# Altium PCB T7BR-PCB.PcbDoc
Units mm, origin at the board's own origin, x right, y up, seen from the top; angles counter-clockwise.
Board outline 149.61 x 68.45 mm, 2 copper layers (Top Layer, Bottom Layer), stack 1.671 mm thick; 35 components, 34 nets, 161 pads, 7 vias.
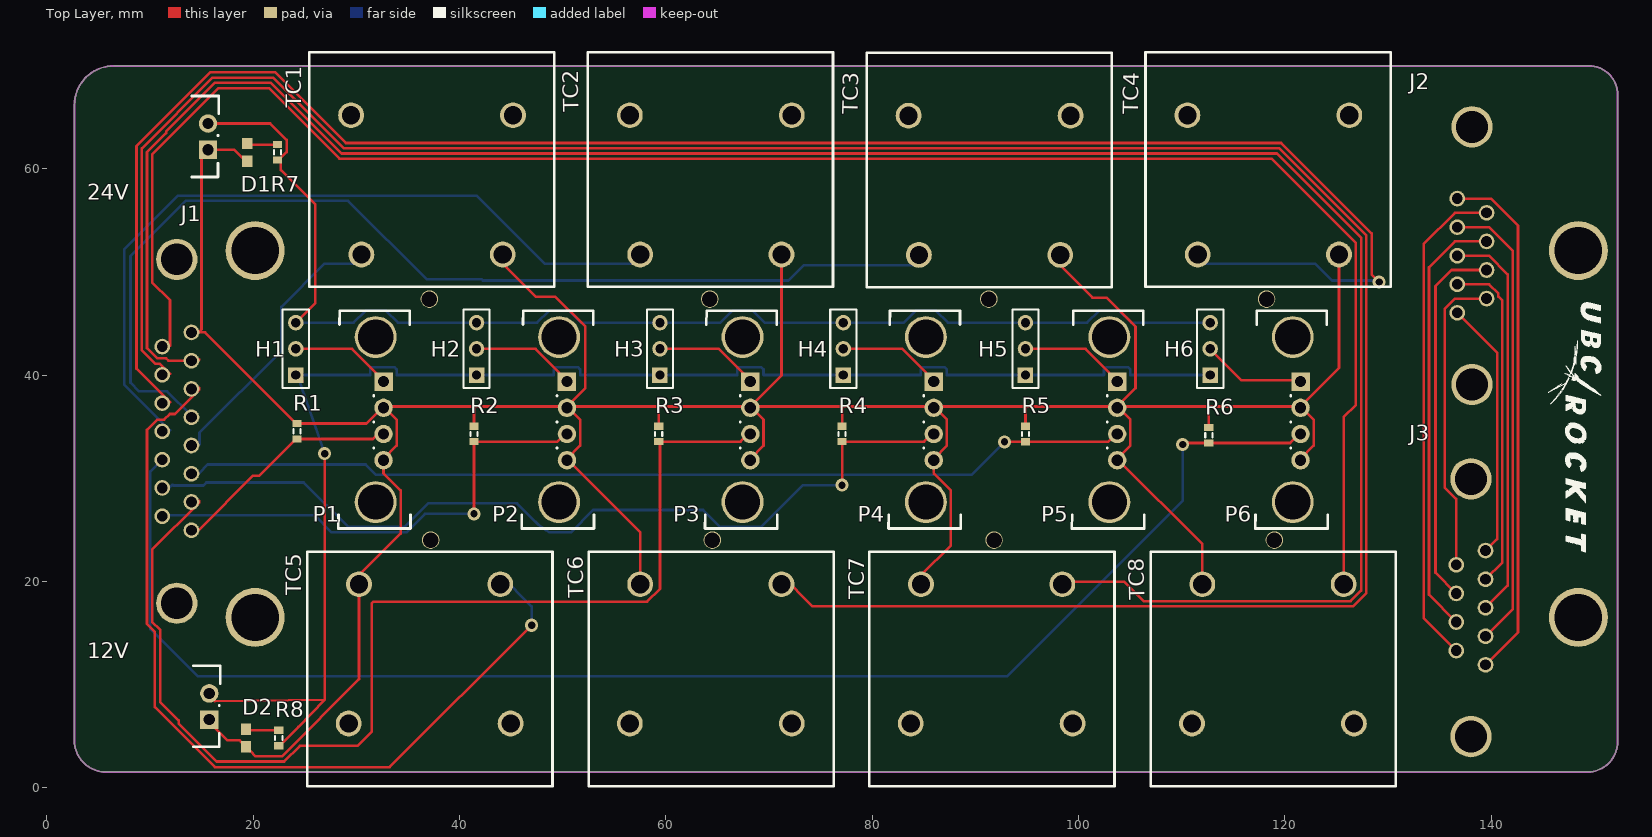
[diagram p0: Top Layer view]
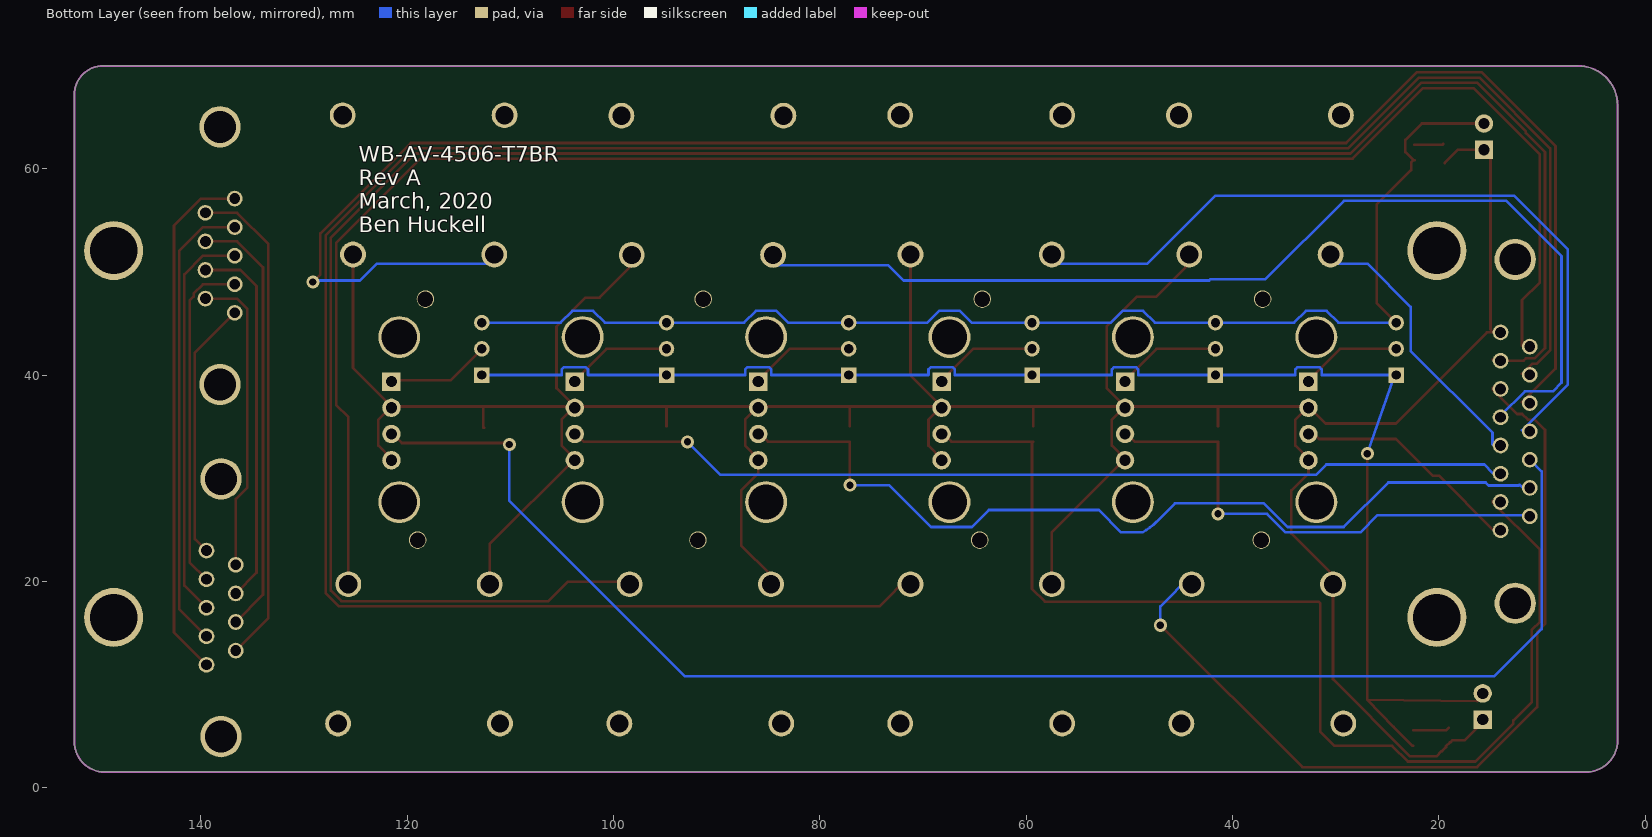
[diagram p1: Bottom Layer view, seen from below]
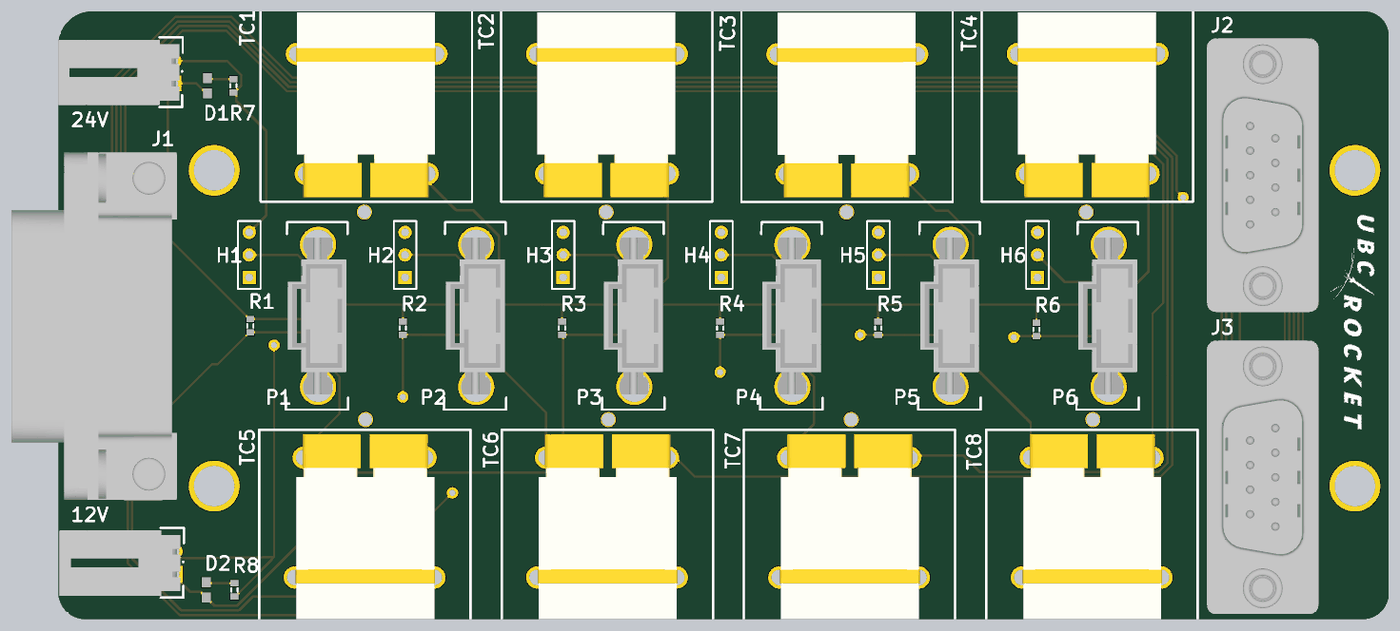
[diagram p2: 3D render of the assembled board from above, using the file's embedded part models]

## Layer stack, top to bottom
Top Solder: solder mask 0.0102, Solder Resist, Dk 3.5
Top Layer: signal copper 0.0356
Dielectric 1: dielectric 1.6, FR-4, Dk 4.8
Bottom Layer: signal copper 0.0356
Bottom Solder: solder mask 0.0102, Solder Resist, Dk 3.5

## Board outline
6.477,69.977 149.479,69.977 cw(c149.479,67.183) 152.273,67.183 152.273,4.445 cw(c149.352,4.445) 149.352,1.524 5.715,1.524 cw(c5.715,4.572) 2.667,4.572 2.667,66.167 cw(c6.477,66.167)

## Design rules (kind name [scope] priority, off if disabled: settings)
Clearance [All] p1: gap=0.152 ignorepadtopadclearanceinfootprint=FALSE except(0: Arc-Hole Track-Hole SMDPad-Hole THPad-Hole Via-Hole Fill-Hole Poly-Hole Region-Hole Text-Hole)
ComponentClearance [All] p1: gap=0 collisioncheckmode=3 verticalgap=0.003 showdistances=FALSE
HoleSize [All] p1: absolutevalues=TRUE maxlimit=25.4 minlimit=0.025 maxpercent=80.000 minpercent=20.000
MinimumSolderMaskSliver [All] p1: minsoldermaskwidth=0.025
PolygonConnect [All] p1: connectstyle=Direct reliefconductorwidth=0.254 reliefentries=4 polygonreliefangle="90 Angle" airgapwidth=0.254
RoomDefinition BMS_REV_A1 [InComponentClass('BMS_REV_A1')] p1: confinementstyle=ConfineIn formatcopy=TRUE lockcomponents=FALSE outline -17.201,7.071 85.199,7.071 85.199,75.57 -17.201,75.57
RoutingVias [All] p1: holewidth=0.2 width=0.505 viastyle="Through Hole" minholewidth=0.2 minwidth=0.505 maxholewidth=0.711 maxwidth=1.27
SilkToSilkClearance [All] p1: silktosilkclearance=0.025
SilkToSolderMaskClearance [IsPad] p1: minsilkscreentomaskgap=0.025 clearancetoexposedcopper=TRUE
SolderMaskExpansion [All] p1: expansion=0.102 istentingtop=FALSE
Width [All] p1: maxlimit=5.08 minlimit=0.254 preferedwidth=0.305
25 further rules are at their usual default settings.

## Components (designator, comment, footprint, x,y, rotation, side; value= is the part's Value field where it differs from the comment)
12V "Header 2H" WM4900-ND 17.272,14.376 r180 top
24V "Header 2H" WM4900-ND 17.145,69.621 r180 top
D1 "" *0603 19.431,61.595 r90 top
D2 "" *0603 19.304,4.826 r90 top
H1 "Header 3" HDR1X3 24.13,40.005 r90 top
H2 "Header 3" HDR1X3 41.656,40.005 r90 top
H3 "Header 3" HDR1X3 59.436,40.005 r90 top
H4 "Header 3" HDR1X3 77.216,40.005 r90 top
H5 "Header 3" HDR1X3 94.869,40.005 r90 top
H6 "Header 3" HDR1X3 112.776,40.005 r90 top
J1 "Connector 15" DSUB_15 12.596,17.879 r90 top
J2 "D Connector 9" DSUB_9 138.153,39.079 r90 top
J3 "D Connector 9" DSUB_9 138.049,29.943 r270 top
P1 "Header 4" WM4900-ND-4 31.115,31.598 r0 top
P2 "Header 4" WM4900-ND-4 48.895,31.598 r0 top
P3 "Header 4" WM4900-ND-4 66.675,31.598 r0 top
P4 "Header 4" WM4900-ND-4 84.455,31.598 r0 top
P5 "Header 4" WM4900-ND-4 102.235,31.598 r0 top
P6 "Header 4" WM4900-ND-4 120.015,31.598 r0 top
R1 "" J1-0603 24.257,34.556 r270 top value=500
R2 "" J1-0603 41.402,34.302 r270 top value=500
R3 "" J1-0603 59.309,34.302 r270 top value=500
R4 "" J1-0603 77.089,34.302 r270 top value=500
R5 "" J1-0603 94.869,34.29 r270 top value=500
R6 "" J1-0603 112.649,34.163 r270 top value=500
R7 "Res3" J1-0603 22.352,61.595 r90 top value=1.1K
R8 "Res3" J1-0603 22.479,4.826 r90 top value=500
TC1 "Header 4H" "Thermocouple F" 29.489,65.189 r0 top
TC2 "Header 4H" "Thermocouple F" 56.515,65.189 r0 top
TC3 "Header 4H" "Thermocouple F" 83.541,65.151 r0 top
TC4 "Header 4H" "Thermocouple F" 110.566,65.189 r0 top
TC5 "Header 4H" "Thermocouple F" 44.958,6.223 r180 top
TC6 "Header 4H" "Thermocouple F" 72.215,6.223 r180 top
TC7 "Header 4H" "Thermocouple F" 99.441,6.223 r180 top
TC8 "Header 4H" "Thermocouple F" 126.714,6.223 r180 top

## Footprints (in the part's own frame and the unit in brackets; to place one, negate y for a bottom-side part, rotate by r counter-clockwise, add the part's x,y. Pads: shape width x height; smd on the part's side, far side on the other; paste and mask are expansions set on the pad)
*0603 [mm]
  rect 1.1x1 smd: 1(-0.85,0) 2(0.85,0)
DSUB_9 [mm]
  round 1.524 hole 1.04: 1(6.955,1.42) 2(8.34,-1.42) 3(9.725,1.42) 4(11.11,-1.42) 5(12.495,1.42) 6(13.88,-1.42) 7(15.265,1.42) 8(16.65,-1.42) 9(18.035,1.42)
  round 4 hole 3.1: 10(0,0) 11(24.99,0)
  body extent -2.95,-6.22 27.85,6.33, height 13
DSUB_15 [mm]
  round 1.524 hole 1.04: 1(7.08,-1.42) 2(8.445,1.42) 3(9.82,-1.42) 4(11.185,1.42) 5(12.56,-1.42) 6(13.925,1.42) 7(15.3,-1.42) 8(16.665,1.42) 9(18.04,-1.42) 10(19.405,1.42) 11(20.78,-1.42) 12(22.145,1.42) 13(23.52,-1.42) 14(24.885,1.42) 15(26.26,-1.42)
  round 4 hole 3.05: 16(0,0) 17(33.33,0)
  body extent -2.95,-3.44 36.22,15.16, height 12.79
HDR1X3 [mm] "Connector; Header; 3 Position"
  rect 1.5x1.5 hole 0.9: 1(0,0)
  round 1.5 hole 0.9: 2(2.54,0) 3(5.08,0)
  silkscreen extent -1.27,-1.27 6.35,1.27
J1-0603 [mm] "Chip Resistor, Body 1.6x0.8mm, IPC High Density"
  rect 0.7x0.9 smd: 1(-0.75,0) 2(0.75,0)
  silkscreen extent -0.2,-0.35 0.2,0.35, body extent -0.85,-0.48 0.85,0.48, height 0.9
"Thermocouple F" [mm]
  round 2.5 hole 1.77: 13(0,0) 14(15.7,0) 15(1,-13.5) 16(14.7,-13.5)
  silkscreen extent -4.06,-16.64 19.7,6.1, body extent -0.08,-16.11 15.62,4.68, height 7.35
WM4900-ND [mm]
  rect 1.79x1.79 hole 1.09: 1(1.524,7.772)
  round 1.79 hole 1.09: 2(1.524,5.232)
  silkscreen extent 0.48,2.57 3.1,10.42, body extent 0.89,2.84 14.48,10.21, height 7.11
WM4900-ND-4 [mil]
  rect 70.47x70.47 hole 42.91: 1(60,306)
  round 70.47 hole 42.91: 2(60,206) 3(60,106) 4(60,6)
  round 160 hole 134: 5(30,-154) 6(30,476)
  silkscreen extent -113,-255 163,576, body extent -104,-187 156,509, height 450

## Part data
12V 24V: "Header, 2-Pin, Right Angle", LatestRevisionDate=17-Jul-2002, LatestRevisionNote="Re-released for DXP Platform.", Publisher="Altium Limited"
D1 D2: library part LTST-C191KGKT, "Green 571nm LED Indication - Discrete 2V 0603 _1608 Metric_", Package="0603 Lite-On", Digi-Key_Part_Number=160-1446-1-ND, Digi-Key_Purchase_URL=https://www.digikey.com/product-detail/en/lite-on-inc/LTST-C191KGKT/160-1446-1-ND/386834?utm_source=snapeda&utm_medium=aggregator&utm_campaign=symbol, MF="Lite-On Inc.", MP=LTST-C191KGKT, SnapEDA_Link=https://www.snapeda.com/parts/LTST-C191KGKT/Lite-On%20Inc./view-part/48565/?ref=snap
H1 H2 H3 H4 H5 H6: "Header, 3-Pin", LatestRevisionDate=17-Jul-2002, LatestRevisionNote="Re-released for DXP Platform.", Publisher="Altium Limited"
J1: "Receptacle Assembly, 15-Pin, Sim Line Connector", PackageDocument=B, DatasheetDocument=24-Nov-1999, Gender="Receptacle Header", LatestRevisionDate=17-Jul-2002, LatestRevisionNote="Re-released for DXP Platform.", Orientation="Right Angle", PackageReference=788574, Positions=15, Published=15-Jun-2001, Publisher="Altium Limited"
J2 J3: "Receptacle Assembly, 9 Position, Right Angle", PackageDocument=O, DatasheetDocument=1-Sep-1999, Gender=Receptacle, LatestRevisionDate=17-Jul-2002, LatestRevisionNote="Re-released for DXP Platform.", Orientation="Right Angle", PackageReference=788750, Positions=9, Published=15-Jun-2001, Publisher="Altium Limited"
P1 P2 P3 P4 P5 P6: "Header, 4-Pin", LatestRevisionDate=17-Jul-2002, LatestRevisionNote="Re-released for DXP Platform.", Publisher="Altium Limited"
R1 R2 R3 R4 R5 R6: library part Res3, "Resistor", LatestRevisionDate=29-May-2009, LatestRevisionNote="IPC-7351 Footprint Added.", PackageDescription="Chip Resistor", PackageReference=J1-0603, Published=8-Jun-2000, Publisher="Altium Limited"
R7 R8: "Resistor", LatestRevisionDate=29-May-2009, LatestRevisionNote="IPC-7351 Footprint Added.", PackageDescription="Chip Resistor", PackageReference=J1-0603, Published=8-Jun-2000, Publisher="Altium Limited"
TC1 TC2 TC3 TC4 TC5 TC6 TC7 TC8: "Header, 4-Pin, Right Angle", LatestRevisionDate=17-Jul-2002, LatestRevisionNote="Re-released for DXP Platform.", Publisher="Altium Limited"

## Free pads (board coordinates)
  round 5.715 hole 4.572: 17(20.193,52.07) 18(20.193,16.51) 19(148.463,52.07) 20(148.463,16.51)
  round 1.7 hole 1.5: 21(37.084,47.371) 21(37.211,24.003) 21(64.262,47.371) 21(64.516,24.003) 21(91.313,47.371) 21(91.821,24.003) 21(118.237,47.371) 21(118.999,24.003)

## Via types
v1: diameter 1.27, hole 0.711, Top Layer to Bottom Layer, 7 vias

## Nets (pads, with @x,y where several pads share a name; then routed paths per layer and width w, separated by ;. In a path a pad name is that pad's centre, name@x,y a point inside that pad or via, vN(x,y) a via of type N, cw(c..) or ccw(c..) an arc to the next point about the centre after c; other vN are vias at no path point)
GND: 12V.1 24V.1 D1.1 D2.1 J1.15 P1.2 P1.4 P2.2 P2.4 P3.2 P3.4 P4.2 P4.4 P5.2 P5.4 P6.2 P6.4 R1.1 R2.1 R3.1 R4.1 R5.1 R6.1 TC1.16 TC2.16 TC3.16 TC4.16 TC5.16 TC6.16 TC7.16 TC8.16 | length 333.5
  Top Layer w0.254: J1.15 14.778,44.139 15.324,44.139 24.157,35.306 R1.1 30.988,35.306 P1.2@32.639,36.957 ; 14.778,44.231 14.986,44.439 14.986,61.849 24V.1 18.162,61.849 19.431,60.58 D1.1@19.431,60.53 ; 12V.1@16.256,5.842 17.485,4.613 18.667,4.613 18.881,4.399 18.931,4.399 19.304,4.026 D2.1 19.304,3.926 19.677,3.553 19.727,3.553 20.232,3.048 22.79,3.048 30.258,10.516 30.258,19.977 30.258,20.612 34.29,24.644 34.29,28.812 32.639,30.463 32.639,31.877 33.915,33.153 33.915,35.681 P1.2@32.639,36.957 ; R2.1 41.402,36.957 P1.2@32.639,36.957 ; 41.529,36.957 P2.2@50.419,36.957 ; TC1.16@44.189,50.8 47.397,47.592 49.292,47.592 52.197,44.687 52.197,38.735 P2.2@50.419,36.957 ; TC6.16@57.515,20.612 57.515,24.781 50.419,31.877 51.695,33.153 51.695,35.681 P2.2@50.419,36.957 ; R3.1 59.309,36.957 ; P3.4@68.199,31.877 69.475,33.153 69.475,35.681 P3.2@68.199,36.957 ; TC2.16@71.215,50.8 71.215,39.973 P3.2@68.199,36.957 ; R4.1 77.089,36.957 ; TC7.16@84.741,20.612 87.63,23.501 87.63,28.812 85.979,30.463 85.979,31.877 87.255,33.153 87.255,35.681 P4.2@85.979,36.957 ; R5.1 94.869,36.957 ; TC3.16@98.241,50.635 101.366,47.51 102.715,47.51 105.537,44.687 105.537,38.735 P5.2@103.759,36.957 ; TC8.16@112.014,19.977 112.014,23.622 103.759,31.877 105.035,33.153 105.035,35.681 P5.2@103.759,36.957 ; R6.1 112.549,34.913 112.649,35.013 112.649,36.957 ; P6.4@121.539,31.877 122.815,33.153 122.815,35.681 P6.2@121.539,36.957 ; TC4.16@125.266,50.8 125.266,40.684 P6.2@121.539,36.957 ; P2.2@50.419,36.957 59.309,36.957 ; 59.309,36.957 P3.2@68.199,36.957 ; P3.2@68.199,36.957 77.089,36.957 ; 77.089,36.957 P4.2@85.979,36.957 ; P4.2@85.979,36.957 94.869,36.957 ; 94.869,36.957 P5.2@103.759,36.957 ; P5.2@103.759,36.957 112.649,36.957 ; 112.649,36.957 P6.2@121.539,36.957
Net12V_2: 12V.2 H1.1 H2.1 H3.1 H4.1 H5.1 H6.1 R8.1 | length 144.9
  Top Layer w0.254: 16.256,8.382 26.924,8.509 ; R8.1 22.579,4.076 24.384,5.881 26.924,8.509 ; H1.1@24.111,39.986 H1.1 H1.1@24.753,39.382 ; v1(26.924,32.385) 26.924,8.509
  Bottom Layer w0.254: v1(26.924,32.385) 24.384,39.751 H1.1 31.363,40.005 31.363,40.55 31.586,40.773 33.692,40.773 33.915,40.55 33.915,40.005 H2.1 49.143,40.005 49.143,40.55 49.366,40.773 51.472,40.773 51.695,40.55 51.695,40.005 H3.1 66.923,40.005 66.923,40.55 67.146,40.773 69.252,40.773 69.475,40.55 69.475,40.005 H4.1 84.703,40.005 84.703,40.55 84.926,40.773 87.032,40.773 87.255,40.55 87.255,40.005 H5.1 102.483,40.005 102.483,40.55 102.706,40.773 104.812,40.773 105.035,40.55 105.035,40.005 H6.1
Net24V_2: 24V.2 H1.3 H2.3 H3.3 H4.3 H5.3 H6.3 R7.1 | length 121.2
  Top Layer w0.254: 24V.2@16.51,64.389 21.647,64.389 23.241,62.795 23.241,61.634 R7.1@22.452,60.845 ; R7.1 R7.1@22.452,60.845 ; H1.3 26.035,46.99 26.035,56.515 22.675,59.875 22.675,60.622 R7.1@22.452,60.845
  Bottom Layer w0.254: H1.3 29.735,45.085 30.878,46.228 32.876,46.228 34.019,45.085 H2.3 47.515,45.085 48.658,46.228 50.656,46.228 51.799,45.085 H3.3 65.295,45.085 66.438,46.228 68.436,46.228 69.579,45.085 H4.3 83.075,45.085 84.218,46.228 86.216,46.228 87.359,45.085 H5.3 100.855,45.085 101.998,46.228 103.996,46.228 105.139,45.085 H6.3
NetD1_2: D1.2 R7.2 | length 2.8
  Top Layer w0.254: D1.2@19.558,62.406 19.619,62.345 R7.2
NetD2_2: D2.2 R8.2 | length 3.5
  Top Layer w0.254: D2.2@19.05,5.803 19.277,5.576 R8.2
NetH1_2: H1.2 P1.1 | length 9.8
  Top Layer w0.254: H1.2 29.591,42.545 P1.1@32.639,39.497
NetH2_2: H2.2 P2.1 | length 10
  Top Layer w0.254: H2.2 47.371,42.545 P2.1@50.419,39.497
NetH3_2: H3.2 P3.1 | length 10
  Top Layer w0.254: H3.2 65.151,42.545 P3.1@68.199,39.497
NetH4_2: H4.2 P4.1 | length 10
  Top Layer w0.254: H4.2 82.931,42.545 P4.1@85.979,39.497
NetH5_2: H5.2 P5.1 | length 10.2
  Top Layer w0.254: H5.2 100.711,42.545 P5.1@103.759,39.497
NetH6_2: H6.2 P6.1 | length 10
  Top Layer w0.254: H6.2 115.824,39.497 P6.1@121.539,39.497
NetJ1_1: J1.1 P1.3 R1.2 | length 21.7
  Top Layer w0.254: 14.778,25.051 19.953,30.226 20.577,30.226 24.157,33.806 R1.2 31.612,33.806 32.223,34.417 P1.3@32.639,34.417
NetJ1_2: J1.2 P2.3 R2.2 | length 47.3
  Top Layer w0.254: v1(41.402,26.543) R2.2 49.479,33.552 50.344,34.417 P2.3@50.419,34.417
  Bottom Layer w0.254: 11.938,26.416 25.953,26.416 27.604,24.765 34.881,24.765 36.659,26.543 v1(41.402,26.543)
NetJ1_3: J1.3 P3.3 R3.2 | length 110.4
  Top Layer w0.254: 14.778,27.791 14.778,27.64 10.215,23.077 10.215,16.083 10.977,15.321 10.977,8.327 12.773,6.531 12.773,6.235 16.467,2.54 23,2.54 24.524,4.064 30.099,4.064 31.496,5.461 31.496,17.885 31.645,18.034 58.187,18.034 59.436,19.283 R3.2@59.436,33.552 ; R3.2 R3.2@59.436,33.552 ; P3.3@68.199,34.417 68.124,34.417 67.259,33.552 R3.2@59.436,33.552
NetJ1_4: J1.4 P4.3 R4.2 | length 86
  Top Layer w0.254: v1(77.089,29.337) 77.089,33.425 R4.2@77.216,33.552 ; R4.2 R4.2@77.216,33.552 ; P4.3@85.979,34.417 85.904,34.417 85.039,33.552 R4.2@77.216,33.552
  Bottom Layer w0.254: 11.938,29.156 12.17,29.388 12.262,29.296 15.159,29.296 15.454,29.591 24.9,29.591 29.218,25.273 34.671,25.273 36.957,27.559 45.593,27.559 47.371,25.781 ccw(c51.73,30.14) 48.711,24.765 48.779,24.765 50.8,24.765 52.959,26.924 63.627,26.924 65.278,25.273 69.215,25.273 73.279,29.337 v1(77.089,29.337)
NetJ1_5: J1.5 P5.3 R5.2 | length 91.4
  Top Layer w0.254: v1(92.837,33.528) 102.87,33.528 P5.3@103.759,34.417
  Bottom Layer w0.254: 14.778,30.531 15.575,31.328 30.902,31.328 31.877,30.353 89.662,30.353 v1(92.837,33.528)
NetJ1_6: J1.6 P6.3 R6.2 | length 143.3
  Top Layer w0.254: v1(110.109,33.274) 110.248,33.413 R6.2 120.535,33.413 P6.3@121.539,34.417
  Bottom Layer w0.254: J1.6 10.033,30.661 10.033,15.389 14.627,10.795 93.091,10.795 110.109,27.813 v1(110.109,33.274)
NetJ1_7: J1.7 TC1.15 | length 26.1
  Bottom Layer w0.254: 14.778,33.271 14.797,33.29 14.797,34.414 22.733,42.35 22.733,46.609 26.924,50.8 TC1.15@30.489,50.8
NetJ1_8: J1.8 TC2.15 | length 74.3
  Bottom Layer w0.254: 11.938,34.636 7.493,39.081 7.493,52.197 12.7,57.404 41.656,57.404 48.26,50.8 TC2.15@57.515,50.8
NetJ1_9: J1.9 TC3.15 | length 102.1
  Bottom Layer w0.254: J1.9 14.016,36.06 11.649,38.427 8.944,38.427 8.106,39.265 8.106,51.54 13.462,56.896 29.21,56.896 36.83,49.276 42.164,49.276 42.271,49.169 71.891,49.169 73.356,50.635 TC3.15@84.541,50.635
NetJ1_10: J1.10 TC4.15 | length 178.7
  Top Layer w0.254: 11.938,37.376 8.691,40.623 8.691,62.198 15.835,69.342 22.141,69.342 28.979,62.504 119.654,62.504 128.421,53.737 128.421,49.76 v1(129.159,49.022)
  Bottom Layer w0.254: TC4.15@111.566,50.8 122.96,50.8 124.591,49.169 129.012,49.169 v1(129.159,49.022)
NetJ1_11: J1.11 TC5.15 | length 84.8
  Top Layer w0.254: 14.778,38.751 14.778,38.6 12.411,36.233 11.919,36.233 11.373,35.687 10.703,35.687 9.707,34.691 9.707,15.872 10.469,15.11 10.469,7.82 16.295,1.994 33.236,1.994 v1(46.99,15.748)
  Bottom Layer w0.254: TC5.15@43.958,20.612 46.99,17.58 v1(46.99,15.748)
NetJ1_12: J1.12 TC6.15 | length 244.3
  Top Layer w0.254: 11.938,40.116 10.956,41.098 10.507,41.098 9.199,42.406 9.199,61.987 16.046,68.834 21.93,68.834 28.768,61.996 119.443,61.996 127.913,53.526 127.913,18.897 126.6,17.584 74.243,17.584 TC6.15@71.215,20.612
NetJ1_13: J1.13 TC7.15 | length 215.8
  Top Layer w0.254: 14.778,41.491 14.74,41.529 14.613,41.402 11.776,41.402 11.557,41.621 10.703,41.621 9.707,42.617 9.707,61.606 11.557,63.456 11.557,63.627 16.256,68.326 21.72,68.326 28.558,61.488 119.233,61.488 127.405,53.316 127.405,19.108 126.39,18.092 106.318,18.092 104.433,19.977 TC7.15@98.441,19.977
NetJ1_14: J1.14 TC8.15 | length 177.5
  Top Layer w0.254: 11.938,42.856 11.938,47.263 10.215,48.986 10.215,61.396 16.637,67.818 21.51,67.818 28.348,60.98 118.725,60.98 126.897,52.808 126.897,37.097 125.714,35.914 TC8.15@125.714,20.612
NetJ2_1: J2.1 J3.1 | length 25.1
  Top Layer w0.254: J2.1 140.589,42.178 140.589,24.108 J3.1
NetJ2_2: J2.2 J3.2 | length 29.8
  Top Layer w0.254: J3.2 136.629,27.996 135.509,29.116 135.509,46.426 136.502,47.419 J2.2
NetJ2_3: J2.3 J3.3 | length 32.9
  Top Layer w0.254: J2.3 139.804,48.804 140.716,47.892 140.716,47.625 141.097,47.244 141.097,21.846 J3.3
NetJ2_4: J2.4 J3.4 | length 36.2
  Top Layer w0.254: J3.4 134.62,20.842 134.62,48.641 136.168,50.189 J2.4
NetJ2_5: J2.5 J3.5 | length 38.8
  Top Layer w0.254: J2.5 139.804,51.574 141.605,49.773 141.605,19.584 J3.5
NetJ2_6: J2.6 J3.6 | length 42.1
  Top Layer w0.254: J3.6 133.985,18.707 133.985,50.442 136.502,52.959 J2.6
NetJ2_7: J2.7 J3.7 | length 44.8
  Top Layer w0.254: J2.7 139.804,54.344 142.113,52.035 142.113,17.322 J3.7
NetJ2_8: J2.8 J3.8 | length 48.1
  Top Layer w0.254: J3.8 133.477,16.445 133.477,52.704 136.502,55.729 J2.8
NetJ2_9: J2.9 J3.9 | length 50.9
  Top Layer w0.254: J2.9 139.99,57.114 142.621,54.483 142.621,15.06 J3.9
pads on no net: J1.16 J1.17 J2.10 J2.11 J3.10 J3.11 P1.5 P1.6 P2.5 P2.6 P3.5 P3.6 P4.5 P4.6 P5.5 P5.6 P6.5 P6.6 TC1.13 TC1.14 TC2.13 TC2.14 TC3.13 TC3.14 TC4.13 TC4.14 TC5.13 TC5.14 TC6.13 TC6.14 TC7.13 TC7.14 TC8.13 TC8.14

## Keep-outs
Keep-Out Layer:
  the board outline again, w0.178

## Silkscreen, mask and mechanical layers (free items; w line width, h text height)
Top Overlay:
  drawing of 28 lines, arcs and shapes, not listed
Bottom Overlay:
  text "WB-AV-4506-T7BR / Rev A / March, 2020 / Ben Huckell" at 124.714,53.848 h1.52